# EAGLE board breakout (EAGLE 7.4.0)
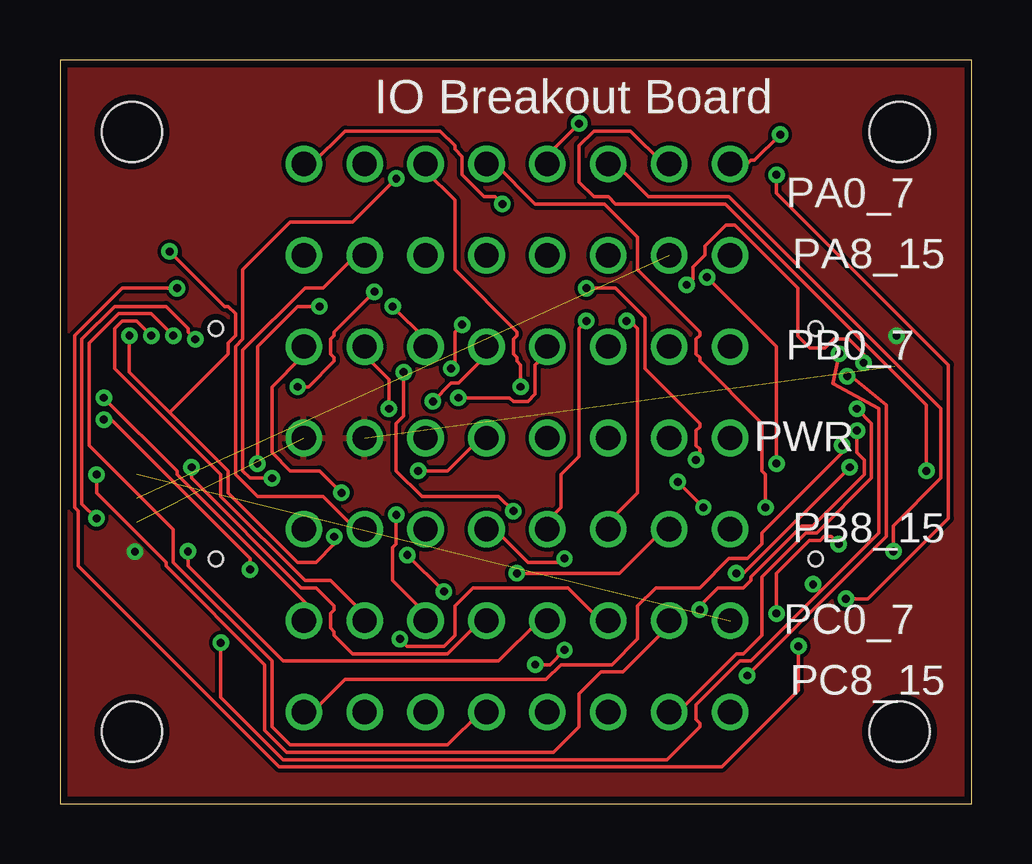
[diagram p0: board, top side]
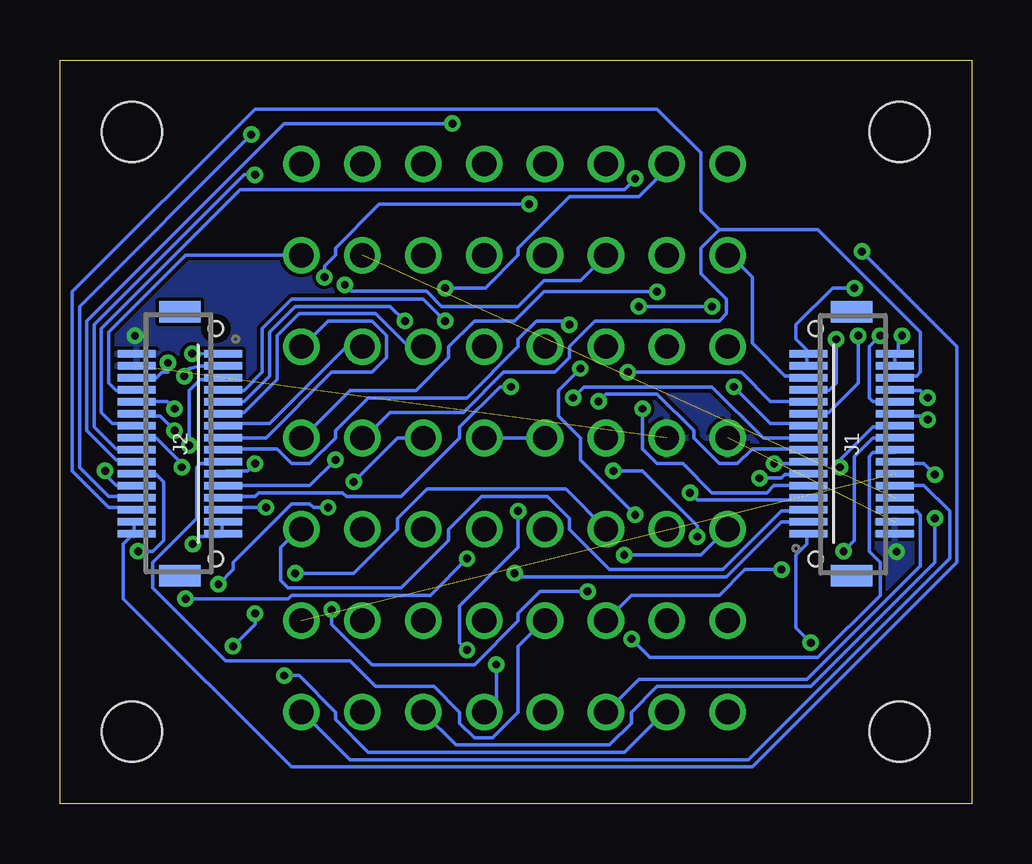
[diagram p1: board, bottom side, seen from below]

Size 38 x 31 mm. Coordinates in mm from the lower left corner, seen from the top.
Outline: 0,0 38,0 38,31 0,31 0,0
Copper layers (1*16): Top 0.0356mm / dielectric 1.5011mm / Bottom 0.0356mm
Design rules "LaenPCBOrder (2) *": minimum track width 6mil, minimum drill 13mil, track to track 6mil, track to pad 6mil, pad to pad 6mil, via to via 6mil, smd to smd 6mil, copper to edge 12mil, drill to drill 6mil, minimum pad ring 7mil, minimum via ring 7mil, stop-mask expansion 14mil, vias tented up to drill 14mil, thermal gap 6mil
Holes 2.5 mm at 3,28 35,28 35,3 3,3

## Footprints (pad centres in the part's own frame; a part is rotated, then mirrored left to right if it is on the bottom)
DF12-32-DS = smd 0.3 x 1.6: 1 -3.75,1.8; 2 -3.75,-1.8; 3 -3.25,1.8; 4 -3.25,-1.8; 5 -2.75,1.8; 6 -2.75,-1.8; 7 -2.25,1.8; 8 -2.25,-1.8; 9 -1.75,1.8; 10 -1.75,-1.8; 11 -1.25,1.8; 12 -1.25,-1.8; 13 -0.75,1.8; 14 -0.75,-1.8; 15 -0.25,1.8; 16 -0.25,-1.8; 17 0.25,1.8; 18 0.25,-1.8; 19 0.75,1.8; 20 0.75,-1.8; 21 1.25,1.8; 22 1.25,-1.8; 23 1.75,1.8; 24 1.75,-1.8; 25 2.25,1.8; 26 2.25,-1.8; 27 2.75,1.8; 28 2.75,-1.8; 29 3.25,1.8; 30 3.25,-1.8; 31 3.75,1.8; 32 3.75,-1.8 | smd 0.889 x 1.727: F1 -5.5,0; F2 5.5,0 | hole 0.6: -4.8,1.5; 4.8,1.5
1X08_FEMALE_LOCK = drill 1.016: 1 0,0; 2 2.54,0; 3 5.08,0; 4 7.62,0; 5 10.16,0; 6 12.7,0; 7 15.24,0; 8 17.78,0

## Placement (x,y rotation side)
J1  DF12-32-DS  [DF12-32-DS]  5,15 90 bottom
J2  DF12-32-DS  [DF12-32-DS]  33,15 270 bottom
PA0_7  [1X08_FEMALE_LOCK]  27.94,26.67 180 top
PA8_15  [1X08_FEMALE_LOCK]  27.94,22.86 180 top
PB0_7  [1X08_FEMALE_LOCK]  27.94,19.05 180 top
PB8_15  [1X08_FEMALE_LOCK]  27.94,11.43 180 top
PC0_7  [1X08_FEMALE_LOCK]  27.94,7.62 180 top
PC8_15  [1X08_FEMALE_LOCK]  27.94,3.81 180 top
PWR  [1X08_FEMALE_LOCK]  27.94,15.24 180 top

## Library data of the parts
J1 J2 = micro1292; PARTNO: AS-ITM-00012
PA0_7 PA8_15 PB0_7 PB8_15 PC0_7 PC8_15 PWR = SparkFun-Connectors

## Nets
GND: J1.2 J1.4 J2.2 J2.4 PWR.7 PWR.8
PA0: J2.26 PA0_7.1
PA1: J2.24 PA0_7.2
PA2: J2.22 PA0_7.3
PA3: J2.20 PA0_7.4
PA4: J2.27 PA0_7.5
PA5: J2.25 PA0_7.6
PA6: J2.23 PA0_7.7
PA7: J2.21 PA0_7.8
PA8: J2.8 PA8_15.1
PA9: J1.8 PA8_15.2
PA13: J2.6 PA8_15.6
PA14: J1.11 PA8_15.7
PA15: J1.27 PA8_15.8
PB0: J2.15 PB0_7.1
PB1: J2.13 PB0_7.2
PB2: J2.11 PB0_7.3
PB3: J1.17 PB0_7.4
PB4: J1.15 PB0_7.5
PB5: J1.13 PB0_7.6
PB6: J1.9 PB0_7.7
PB7: J1.7 PB0_7.8
PB8: J1.5 PB8_15.1
PB9: J1.3 PB8_15.2
PB10: J2.9 PB8_15.3
PB11: J2.7 PB8_15.4
PB12: J2.18 PB8_15.5
PB13: J2.16 PB8_15.6
PB14: J2.14 PB8_15.7
PB15: J2.12 PB8_15.8
PC0: J1.12 PC0_7.1
PC1: J1.14 PC0_7.2
PC2: J1.16 PC0_7.3
PC3: J1.18 PC0_7.4
PC4: J1.20 J2.19 PC0_7.5
PC5: J1.22 J2.17 PC0_7.6
PC6: J1.24 PC0_7.7
PC7: J1.26 PC0_7.8
PC8: J1.10 PC8_15.1
PC9: J2.10 PC8_15.2
PC10: J1.25 PC8_15.3
PC11: J1.23 PC8_15.4
PC12: J1.21 PC8_15.5
PC13: J1.6 PC8_15.6
PD2: J1.19 PWR.1
PWR_ON: J1.28 J2.28 PWR.2
RESET#: J1.1 J2.1 PWR.3
RSV0: J2.3 PC8_15.7
RSV1: J2.5 PC8_15.8
VCC: J1.30 J1.32 J2.30 J2.32 PWR.4 PWR.5
VCC_3V3: J1.29 J1.31 J2.29 J2.31

## Tracks (layer width: path | path; a pad name or v marks a point on that pad's centre or on a via)
GND  (via drill 0.33)  (2 unrouted)
  other vias: 34.88,19.5 3.12,10.5
  pour Top: 0,0 38,0 38,31 0,31
  pour Bottom: 0,0 38,0 38,31 0,31
PA0  (via drill 0.33)
  Top 0.152: v30.02,27.89 28.96,26.82 28.8,26.82 28.65,26.67 28.04,26.67 PA0_7.1
  Bottom 0.152: v30.02,27.89 37.19,20.73 37.19,14.02 35.97,12.8 34.9,12.8 J2.26
PA1  (via drill 0.33)
  Top 0.152: v36.12,13.87 36.12,16.61 27.74,24.99 23.16,24.99 22.86,25.3 22.25,25.3 21.64,25.91 21.64,27.43 22.25,28.04 23.77,28.04 25.15,26.67 25.3,26.67 PA0_7.2
  Bottom 0.152: v36.12,13.87 36.12,13.72 35.66,13.26 34.9,13.26 J2.24
PA2  (via drill 0.33)
  Top 0.152: v34.75,10.52 34.75,11.58 36.73,13.56 36.73,16.46 27.89,25.3 24.54,25.3 23.16,26.67 PA0_7.3
  Bottom 0.152: v34.75,10.52 34.14,10.52 33.68,10.97 33.68,13.41 33.98,13.72 34.75,13.72 J2.22
PA3  (via drill 0.33)
  Top 0.152: v21.64,28.35 20.42,27.13 20.42,26.67 PA0_7.4
  Bottom 0.152: v21.64,28.35 28.65,28.35 36.88,20.12 36.88,15.54 35.66,14.33 34.9,14.33 J2.20
PA4  (via drill 0.33)
  Top 0.152: v29.41,12.34 29.41,13.72 29.26,13.87 29.26,15.85 26.67,18.44 26.67,18.59 26.52,18.75 26.52,19.36 26.67,19.51 26.67,19.66 24.08,22.25 24.08,23.62 22.71,24.99 19.81,24.99 18.14,26.67 17.83,26.67 PA0_7.5
  Bottom 0.152: v29.41,12.34 31.09,12.34 J2.27
PA5  (via drill 0.33)
  Top 0.152: v19.2,17.37 19.2,18.29 19.05,18.44 19.05,18.59 18.9,18.75 18.9,19.36 19.05,19.51 19.05,19.66 16.46,22.25 16.46,25.15 15.24,26.36 PA0_7.6
  Bottom 0.152: v19.2,17.37 19.66,17.37 21.34,15.7 21.34,15.24 23.77,12.8 26.06,12.8 26.21,12.95 29.72,12.95 29.87,12.8 31.09,12.8 J2.25
PA6  (via drill 0.33)
  Top 0.152: v26.52,14.33 26.52,14.48 26.67,14.63 26.67,14.78 26.52,14.94 26.52,15.54 26.67,15.7 26.67,15.85 24.38,18.14 24.38,20.27 23.16,21.49 v21.95,21.49
  Bottom 0.152: v26.52,14.33 27.58,13.26 31.09,13.26 J2.23 | v21.95,21.49 20.27,21.49 18.9,22.86 18.9,23.16 16.76,25.3 13.87,25.3 12.8,26.36 12.8,26.67 PA0_7.7
PA7  (via drill 0.33)
  Top 0.152: v29.87,14.17 29.87,19.05 v26.98,21.95 | v18.44,24.99 18.14,25.3 17.68,25.3 16.76,26.21 16.76,26.98 16.46,27.28 16.46,27.43 15.85,28.04 11.89,28.04 10.52,26.67 10.21,26.67 PA0_7.8
  Bottom 0.152: v29.87,14.17 30.18,13.87 31.09,13.87 J2.21 | v26.98,21.95 26.98,22.4 26.52,22.86 26.52,23.16 24.69,24.99 v18.44,24.99
PA8
  Bottom 0.152: J2.8 34.9,17.22 35.66,17.22 35.97,17.53 35.97,19.66 32.77,22.86 28.04,22.86 PA8_15.1
PA9  (1 unrouted)
PA13  (via drill 0.33)
  Top 0.152: v26.12,21.62 26.38,21.88 26.38,22.38 26.88,22.88 26.88,23.25 27.75,24.12 28.12,24.12 30.75,21.5 30.75,19.5 31.25,19 31.88,19 32.25,19.38 32.88,19.38 33.5,18.75 v33.5,18.38
  Bottom 0.152: PA8_15.6 16.31,21.79 17.83,21.79 18.9,20.73 22.1,20.73 22.71,21.34 22.75,21.38 25.88,21.38 v26.12,21.62 | v33.5,18.38 33.5,18 33.75,18 34,17.75 34.75,17.75 J2.6
PA14  (via drill 0.33)
  Top 0.152: v8.84,13.56 7.92,13.56 7.62,13.87 7.62,18.9 10.21,21.49 10.97,21.49 12.34,22.86 12.65,22.86 PA8_15.7
  Bottom 0.152: v8.84,13.56 7.92,13.56 7.77,13.72 6.86,13.72 J1.11
PA15
  Bottom 0.152: J1.27 6.86,17.83 7.77,17.83 9.14,19.2 9.14,21.95 10.06,22.86 PA8_15.8
PB0
  Bottom 0.152: J2.15 31.09,15.24 29.41,15.24 26.67,17.98 24.99,17.98 24.38,18.59 24.38,19.51 24.99,20.12 26.82,20.12 27.89,19.05 PB0_7.1
PB1
  Bottom 0.152: J2.13 31.09,15.85 29.26,15.85 26.06,19.05 25.45,19.05 PB0_7.2
PB2
  Bottom 0.152: PB0_7.3 23.47,19.05 24.84,20.42 28.04,20.42 28.96,19.51 28.96,17.68 30.33,16.31 31.09,16.31 J2.11
PB3  (via drill 0.33)
  Top 0.152: v16.61,16.92 18.75,16.92 18.9,16.76 19.51,16.76 19.81,17.07 19.81,18.29 20.27,18.75 20.27,19.05 PB0_7.4
  Bottom 0.152: v16.61,16.92 16.15,17.37 10.82,17.37 8.69,15.24 6.86,15.24 J1.17
PB4  (via drill 0.33)
  Top 0.152: v15.54,16.76 16.31,17.53 16.61,17.53 17.68,18.59 17.68,19.05 PB0_7.5
  Bottom 0.152: v15.54,16.76 15.24,17.07 13.11,17.07 11.58,15.54 11.58,15.24 10.52,14.17 9.75,14.17 9.14,14.78 6.86,14.78 J1.15
PB5  (via drill 0.33)
  Top 0.152: v8.23,14.17 8.23,19.05 9.91,20.73 v10.82,20.73 | v13.87,20.73 15.24,19.36 PB0_7.6
  Bottom 0.152: v8.23,14.17 6.86,14.17 J1.13 | v13.87,20.73 v10.82,20.73
PB6  (via drill 0.33)
  Top 0.152: v13.72,16.46 13.72,17.68 12.8,18.59 12.8,19.05 PB0_7.7
  Bottom 0.152: v13.72,16.46 13.72,14.78 13.11,14.17 12.04,14.17 10.82,12.95 8.53,12.95 8.23,13.26 6.86,13.26 J1.9
PB7  (via drill 0.33)
  Top 0.152: v11.73,12.95 10.82,13.87 9.6,13.87 8.84,14.63 8.84,17.37 10.06,18.59 10.06,19.05 PB0_7.8
  Bottom 0.152: v11.73,12.95 11.43,12.65 6.86,12.65 J1.7
PB8
  Bottom 0.152: J1.5 6.86,12.19 7.92,12.19 10.36,9.75 15.09,9.75 16.76,11.43 16.76,11.89 17.68,12.8 20.42,12.8 21.79,11.43 21.79,10.97 23.77,8.99 28.5,8.99 28.8,9.3 28.8,10.67 28.04,11.43 PB8_15.1
PB9  (via drill 0.33)
  Top 0.152: v19.05,9.6 23.32,9.6 25.15,11.43 25.3,11.43 PB8_15.2
  Bottom 0.152: v19.05,9.6 18.9,9.45 10.21,9.45 7.92,11.73 6.86,11.73 J1.3
PB10  (via drill 0.33)
  Top 0.152: v23.62,20.12 23.77,20.12 24.08,19.81 24.08,12.95 22.86,11.73 PB8_15.3
  Bottom 0.152: v23.62,20.12 24.23,20.73 28.19,20.73 29.26,19.66 29.26,17.83 30.33,16.76 31.09,16.76 J2.9
PB11  (via drill 0.33)
  Top 0.152: v21.95,20.12 21.64,19.81 21.64,14.48 20.88,13.72 20.88,12.34 20.42,11.89 20.42,11.43 PB8_15.4
  Bottom 0.152: v21.95,20.12 22.86,21.03 28.35,21.03 29.57,19.81 29.57,17.98 30.33,17.22 31.09,17.22 J2.7
PB12  (via drill 0.33)
  Top 0.152: v29.87,26.21 29.87,25.45 37.03,18.29 37.03,11.89 33.68,8.53 v32.77,8.53 | v21.03,10.21 20.88,10.06 19.51,10.06 18.14,11.43 17.83,11.43 PB8_15.5
  Bottom 0.152: v29.87,26.21 30.33,26.21 36.58,19.96 36.58,15.7 35.66,14.78 34.9,14.78 J2.18 | v32.77,8.53 28.5,8.53 28.35,8.69 22.55,8.69 v21.03,10.21
PB13  (via drill 0.33)
  Top 0.152: v32.92,14.02 28.5,9.6 v28.19,9.6
  Bottom 0.152: v32.92,14.02 32.92,14.17 33.98,15.24 34.75,15.24 J2.16 | v28.19,9.6 25.76,9.6 23.93,11.43 23.93,11.89 22.71,13.11 16.92,13.11 PB8_15.6
PB14  (via drill 0.33)
  Top 0.152: v14.02,26.06 12.19,24.23 9.6,24.23 7.62,22.25 7.62,19.36 7.32,19.05 7.32,13.72 8.23,12.8 10.97,12.8 12.34,11.43 12.65,11.43 PB8_15.7
  Bottom 0.152: v14.02,26.06 14.48,25.6 30.48,25.6 36.27,19.81 36.27,16.31 35.81,15.85 34.9,15.85 J2.14
PB15  (via drill 0.33)
  Top 0.152: v33.22,15.54 33.22,14.63 33.53,14.33 33.53,13.72 31.39,11.58 30.94,11.58 28.8,9.45 28.8,9.3 28.5,8.99 27.43,8.99 26.67,8.23 v26.67,8.08 | v14.48,10.36 v16,8.84
  Bottom 0.152: v33.22,15.54 33.83,16.15 34.75,16.15 J2.12 | v26.67,8.08 26.67,7.47 24.99,5.79 20.73,5.79 18.9,7.62 18.9,7.92 17.98,8.84 v16,8.84 | v14.48,10.36 11.28,10.36 10.21,11.43 PB8_15.8
PC0  (1 unrouted)
PC1  (via drill 0.33)
  Top 0.152: v1.52,13.72 1.52,12.95 4.42,10.06 4.42,9.91 8.53,5.79 8.53,3.05 9.45,2.13 20.57,2.13 21.64,3.2 21.64,4.57 22.55,5.49 23.47,5.49 25.3,7.32 25.3,7.62 PC0_7.2
  Bottom 0.152: v1.52,13.72 1.98,14.17 3.05,14.17 J1.14
PC2  (via drill 0.33)
  Top 0.152: v14.17,6.86 14.48,6.55 16,6.55 16.46,7.01 16.46,8.23 17.22,8.99 21.18,8.99 22.55,7.62 PC0_7.3
  Bottom 0.152: v14.17,6.86 13.41,6.1 6.4,6.1 3.81,8.69 3.81,10.06 4.27,10.52 4.27,14.48 4.12,14.63 3.2,14.63 J1.16
PC3  (via drill 0.33)
  Top 0.152: v5.33,10.52 5.33,9.91 9.3,5.94 18.29,5.94 19.96,7.62 20.27,7.62 PC0_7.4
  Bottom 0.152: v5.33,10.52 4.88,10.97 4.88,14.48 4.12,15.24 J1.18
PC4  (via drill 0.33)
  Top 0.152: v5.49,14.02 5.49,13.56 10.06,8.99 10.67,8.99 11.43,8.23 11.43,8.08 11.28,7.92 11.28,7.32 11.43,7.16 11.43,7.01 12.19,6.25 16.15,6.25 17.53,7.62 17.68,7.62 PC0_7.5
  Bottom 0.152: J2.19 31.24,14.17 32.16,14.17 32.31,14.02 32.31,11.89 34.14,10.06 34.14,8.99 31.09,5.94 25.91,5.94 24.84,4.88 22.4,4.88 21.34,3.81 21.34,3.35 20.73,2.74 19.96,2.74 18.9,3.81 18.9,6.55 17.83,7.62 PC0_7.5 | v5.49,14.02 5.49,14.33 4.12,15.7 3.2,15.7 J1.20
PC5  (via drill 0.33)
  Top 0.152: v1.83,16 2.13,16 7.92,10.21 v7.92,9.75 | v16.76,19.96 16.46,19.66 16.46,18.29 v16.31,18.14 | v14.02,12.04 14.02,10.82 13.87,10.67 13.87,9.3 15.24,7.92 PC0_7.6
  Bottom 0.152: v1.83,16 1.98,16.15 3.05,16.15 J1.22 | v7.92,9.75 9.45,9.75 10.52,8.69 14.17,8.69 PC0_7.6 | v16.76,19.96 16.92,20.12 18.14,20.12 18.9,19.36 18.9,19.05 21.03,16.92 25.15,16.92 26.52,15.54 26.52,15.24 27.58,14.17 28.35,14.17 28.96,14.78 31.09,14.78 J2.17 | v16.31,18.14 17.22,17.22 17.22,16.15 16.31,15.24 16.31,14.33 v14.02,12.04
PC6  (via drill 0.33)
  Top 0.152: v3.81,19.51 3.2,20.12 2.59,20.12 2.29,19.81 2.29,18.14 6.71,13.72 6.71,12.8 10.21,9.3 11.28,9.3 12.65,7.92 12.65,7.62 PC0_7.7
  Bottom 0.152: v3.81,19.51 4.27,19.05 4.27,16.92 4.12,16.76 3.2,16.76 J1.24
PC7  (via drill 0.33)
  Top 0.152: v1.83,16.92 4.88,13.87 4.88,13.72 10.21,8.38 10.21,7.62 PC0_7.8
  Bottom 0.152: v1.83,16.92 2.13,17.22 3.05,17.22 J1.26
PC8
  Bottom 0.152: J1.10 3.05,13.26 1.98,13.26 0.91,12.19 0.91,10.21 9.3,1.83 25.91,1.83 27.89,3.81 PC8_15.1
PC9  (via drill 0.33)
  Top 0.152: v33.22,16.46 33.83,15.85 33.83,13.56 31.55,11.28 31.09,11.28 29.26,9.45 29.26,7.01 28.5,6.25 28.19,6.25 25.76,3.81 25.45,3.81 PC8_15.2
  Bottom 0.152: v33.22,16.46 33.53,16.76 34.75,16.76 J2.10
PC10  (via drill 0.33)
  Top 0.152: v5.64,19.36 5.33,19.66 5.33,19.81 4.42,20.73 2.29,20.73 0.91,19.36 0.91,12.5 v1.52,11.89
  Bottom 0.152: v5.64,19.36 5.64,17.53 5.94,17.22 6.71,17.22 J1.25 | v1.52,11.89 1.52,10.06 6.71,4.88 13.11,4.88 14.17,3.81 14.17,3.35 15.09,2.44 21.49,2.44 PC8_15.3
PC11  (via drill 0.33)
  Top 0.152: v14.33,17.98 14.33,16.15 14.02,15.85 14.02,13.87 15.09,12.8 18.29,12.8 v18.9,12.19 | v21.03,6.4 20.42,5.79 v19.81,5.79
  Bottom 0.152: v14.33,17.98 9.6,17.98 8.38,16.76 6.86,16.76 J1.23 | v18.9,12.19 18.9,10.67 21.34,8.23 21.34,6.71 v21.03,6.4 | v19.81,5.79 19.81,4.27 20.27,3.81 PC8_15.4
PC12  (via drill 0.33)
  Top 0.152: v4.72,19.51 3.81,20.42 2.44,20.42 1.22,19.2 1.22,14.94 4.72,11.43 4.72,10.06 8.84,5.94 8.84,3.2 9.6,2.44 16.15,2.44 17.53,3.81 17.68,3.81 PC8_15.5
  Bottom 0.152: v4.72,19.51 4.72,17.53 5.94,16.31 6.71,16.31 J1.21
PC13
  Bottom 0.152: PC8_15.6 13.87,5.18 6.86,5.18 2.13,9.91 2.13,12.04 2.29,12.19 3.05,12.19 J1.6
PD2  (via drill 0.33)
  Top 0.152: v9.91,17.37 10.36,17.37 11.43,18.44 11.43,18.59 11.28,18.75 11.28,19.36 11.43,19.51 11.43,19.66 v13.11,21.34
  Bottom 0.152: v9.91,17.37 8.38,15.85 6.86,15.85 J1.19 | v13.11,21.34 17.83,21.34 19.05,20.12 20.73,20.12 21.79,19.05 21.79,18.59 23.16,17.22 25.91,17.22 27.89,15.24 PWR.1
PWR_ON
  Bottom 0.152: 10.52,23.93 6.4,23.93 2.13,19.66 2.13,17.98 2.29,17.83 3.05,17.83 J1.28 | 10.52,23.93 11.28,23.16 11.28,22.1 10.21,21.03 10.21,20.42 10.52,20.12 15.7,20.12 16.76,19.05 16.76,18.59 17.37,17.98 19.51,17.98 21.18,16.31 24.23,16.31 25.3,15.24 PWR.2 | 10.52,23.93 11.28,24.69 11.28,27.13 13.11,28.96 29.87,28.96 37.49,21.34 37.49,13.87 35.97,12.34 34.9,12.34 J2.28
RESET#  (via drill 0.33)
  Top 0.152: v6.71,6.71 6.71,4.42 9.3,1.83 25.3,1.83 26.67,3.2 26.67,3.35 26.52,3.5 26.52,4.12 28.35,5.94 28.8,5.94 31.7,8.84 | 31.7,8.84 34.14,11.28 34.14,16.46 32.21,17.51 v32.49,18.75 | v26.82,12.34 v25.76,13.41 | 31.7,8.84 v31.39,9.14
  Bottom 0.152: v6.71,6.71 7.32,7.32 7.32,10.36 6.86,10.82 6.86,11.12 J1.1 | v32.49,18.75 32.18,18.75 31.6,18.75 31.24,18.75 J2.1 | PWR.3 23.93,15.24 v25.76,13.41 | v26.82,12.34 27.43,12.34 27.58,12.5 28.35,12.5 30.79,10.06 30.79,9.75 v31.39,9.14
RSV0  (via drill 0.33)
  Top 0.152: v32.82,17.82 33.07,17.73 34.44,16.61 34.44,11.12 v28.65,5.33
  Bottom 0.152: v32.82,17.82 32.82,18.06 32.19,18.24 J2.3 | v28.65,5.33 28.04,5.33 26.52,3.81 26.52,3.5 25.15,2.13 14.48,2.13 12.8,3.81 PC8_15.7
RSV1  (via drill 0.33)
  Top 0.152: v32.61,14.94 32.61,14.63 29.26,11.28 29.26,10.82 28.65,10.21 27.89,10.21 26.67,8.99 24.84,8.99 24.08,8.23 24.08,6.86 23.01,5.79 20.88,5.79 20.27,5.18 11.89,5.18 10.52,3.81 10.21,3.81 PC8_15.8
  Bottom 0.152: v32.61,14.94 32.61,17.22 32.16,17.68 31.24,17.68 J2.5
VCC  (via drill 0.33)
  Top 0.152: v2.9,19.51 2.9,17.98 4.57,16.31 | 4.57,16.31 7.01,13.87 7.01,12.95 9.91,10.06 10.67,10.06 11.43,10.82 v11.43,11.12 | v14.94,13.87 16.15,13.87 17.53,15.24 17.68,15.24 PWR.5 | v4.57,23.01 6.86,20.73 7.01,20.73 7.32,20.42 7.32,19.51 7.01,19.2 7.01,18.75 4.57,16.31
  Bottom 0.152: J2.30 34.9,11.73 34.9,11.28 J2.32 34.9,11.12 35.05,11.12 35.36,10.82 35.36,8.53 28.35,1.52 9.14,1.52 0.61,10.06 0.61,19.05 v4.57,23.01 | J1.30 3.2,18.29 J1.32 3.05,18.9 3.05,19.36 v2.9,19.51 | v11.43,11.12 11.43,11.58 13.72,13.87 v14.94,13.87 | PWR.4 20.27,15.24 17.83,15.24 PWR.5
VCC_3V3  (via drill 0.33)
  Top 0.152: v32.46,10.82 32.16,11.12 31.85,11.12 31.7,10.97 31.24,10.97 29.87,9.6 v29.87,7.92 | v30.79,6.55 30.79,4.72 27.58,1.52 9.14,1.52 0.76,9.91 0.76,12.19 0.61,12.34 0.61,19.51 2.59,21.49 v4.88,21.49
  Bottom 0.152: J2.29 31.24,11.73 31.24,11.28 J2.31 31.24,11.12 32.16,11.12 v32.46,10.82 | J1.29 6.86,18.29 6.86,18.75 J1.31 6.86,18.9 7.32,19.36 7.32,19.96 5.79,21.49 v4.88,21.49 | v29.87,7.92 29.87,7.47 v30.79,6.55

## Text on the board
tNames: IO Breakout Board